# EAGLE board Qwiic RFID - IDXXLA-MiddleJig (EAGLE 9.2.1)
REVISION: A

Size 38.1 x 43.18 mm. Coordinates in mm from the lower left corner, seen from the top.
Outline: 0,40.64 arc-80 2.54,43.18 35.56,43.18 arc-80 38.1,40.64 38.1,2.54 arc-80 35.56,0 2.54,0 arc-80 0,2.54 0,40.64
Outline: 10.16,33.02 27.94,33.02 27.94,10.16 10.16,10.16 10.16,33.02
Copper layers (1*16): Top 0.035mm / dielectric 1.5mm / Bottom 0.035mm
Design rules "SparkFun-2-layer-PCBWay-LIMIT": minimum track width 6mil, minimum drill 0.3mm, track to track 6mil, track to pad 6mil, pad to pad 6mil, via to via 6mil, smd to smd 6mil, copper to edge 6mil, drill to drill 6mil, minimum pad ring 6mil, minimum via ring 6mil, stop-mask expansion 4mil, vias tented up to drill 25mil, thermal gap 10mil
Net classes: 1 power: width 0.203 mm
Holes 1.7 mm at 28.7,7.62 10.92,7.62 13.46,7.62 16,7.62 18.54,7.62 23.62,7.62 26.16,7.62 21.08,7.62 21.59,14.99 21.59,17.53 19.05,14.99 19.05,17.53 16.51,14.99 16.51,17.53

## Footprints (pad centres in the part's own frame; a part is rotated, then mirrored left to right if it is on the bottom)
STAND-OFF-TIGHT = hole 3.048: 0,0
NUBBIN_LOCKER = hole 2.794: 0,0
STAND-OFF = hole 3.302: 0,0

## Placement (x,y rotation side)
E$1  [STAND-OFF-TIGHT]  3.17,6.35 0 top
E$2  [STAND-OFF-TIGHT]  3.17,36.83 0 top
E$3  [STAND-OFF-TIGHT]  34.92,6.35 0 top
E$4  [STAND-OFF-TIGHT]  34.92,36.83 0 top
E$5  [NUBBIN_LOCKER]  19.05,2.03 0 top
E$6  [NUBBIN_LOCKER]  19.05,41.15 0 top
FRAME1  FRAME-LETTER  [CREATIVE_COMMONS]  54.61,-3.81 0 top  (outside the outline)
JP3  STAND-OFF  [STAND-OFF]  8.89,34.29 0 top
JP4  STAND-OFF  [STAND-OFF]  29.21,34.29 0 top
LOGO1  OSHW-LOGOMINI  [OSHW-LOGO-MINI]  25.27,34.92 0 bottom
U$1  [SPARKX-TINY]  13.97,35.56 0 bottom
U$3  [ANT20]  27.94,7.87 90 bottom
U$4  SPARKX-LOGO3  [SPARKX-SMALL]  27.94,25.4 0 top
U$5  [RST#-[>]  20.32,7.75 90 top
U$6  [SDA-[)]  15.24,7.87 90 top
U$7  [SCL-[)]  17.78,7.87 90 top
U$9  [GND-04]  10.16,7.87 90 top
U$10  [3V3-04]  12.7,7.87 90 top
U$11  [INT#-[<]  22.86,7.75 90 top
U$14  [PWR-()-03]  7.24,28.45 0 top
U$16  [ANT10]  25.4,7.87 90 top
U$17  [ANT20]  27.94,7.87 90 top
U$18  [READ0]  31.5,28.83 0 bottom
U$19  [QWIIC_RFID0]  11.05,33.27 0 top
U$20  [ANT10]  25.4,7.87 90 bottom
U$21  [INT#-[<]  22.86,7.75 90 bottom
U$22  [SCL-[)]  17.78,7.87 90 bottom
U$23  [SDA-[)]  15.24,7.87 90 bottom
U$24  [3V3-04]  12.7,7.87 90 bottom
U$25  [GND-04]  10.16,7.87 90 bottom
U$26  [RST#-[>]  20.32,7.75 90 bottom

## Library data of the parts
E$1-E$6 = SparkFun-Hardware
FRAME1 LOGO1 = SparkFun-Aesthetics
JP3 JP4 = SparkFun
U$1 U$4 = SparkX
U$3 U$17 = ANT2
U$5-U$7 U$9-U$11 U$14 U$21-U$26 = Labels
U$16 U$20 = ANT1
U$18 = READ
U$19 = QWIIC_RFID

## Text on the board
Top: Up-MiddleLayer
Bottom: Down-MiddleLayer
Dimension: Route Out
tPlace: #666 | Qwiic RFID | SPX-14867
Measures: Units in Inches
tDocu: Elias Santistevan